# Altium PCB PCB1.PcbDoc
Units mm, origin at the board's own origin, x right, y up, seen from the top; angles counter-clockwise.
Board outline 49 x 100 mm, 2 copper layers (Top Layer, Bottom Layer); 19 components, 39 nets, 180 pads, 5 vias.
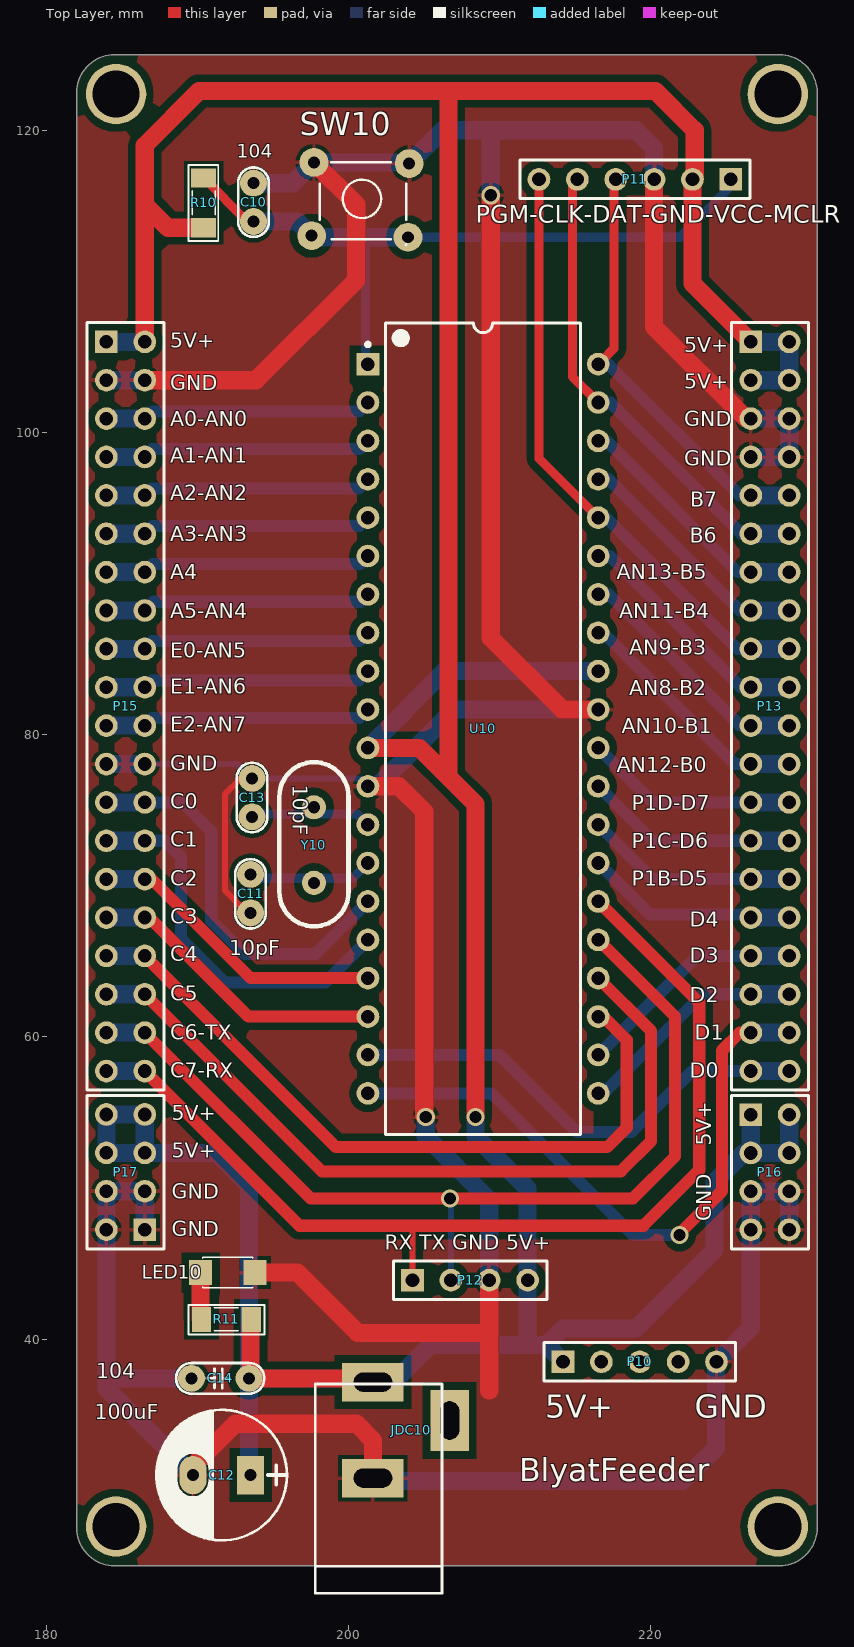
[diagram p0: Top Layer view]
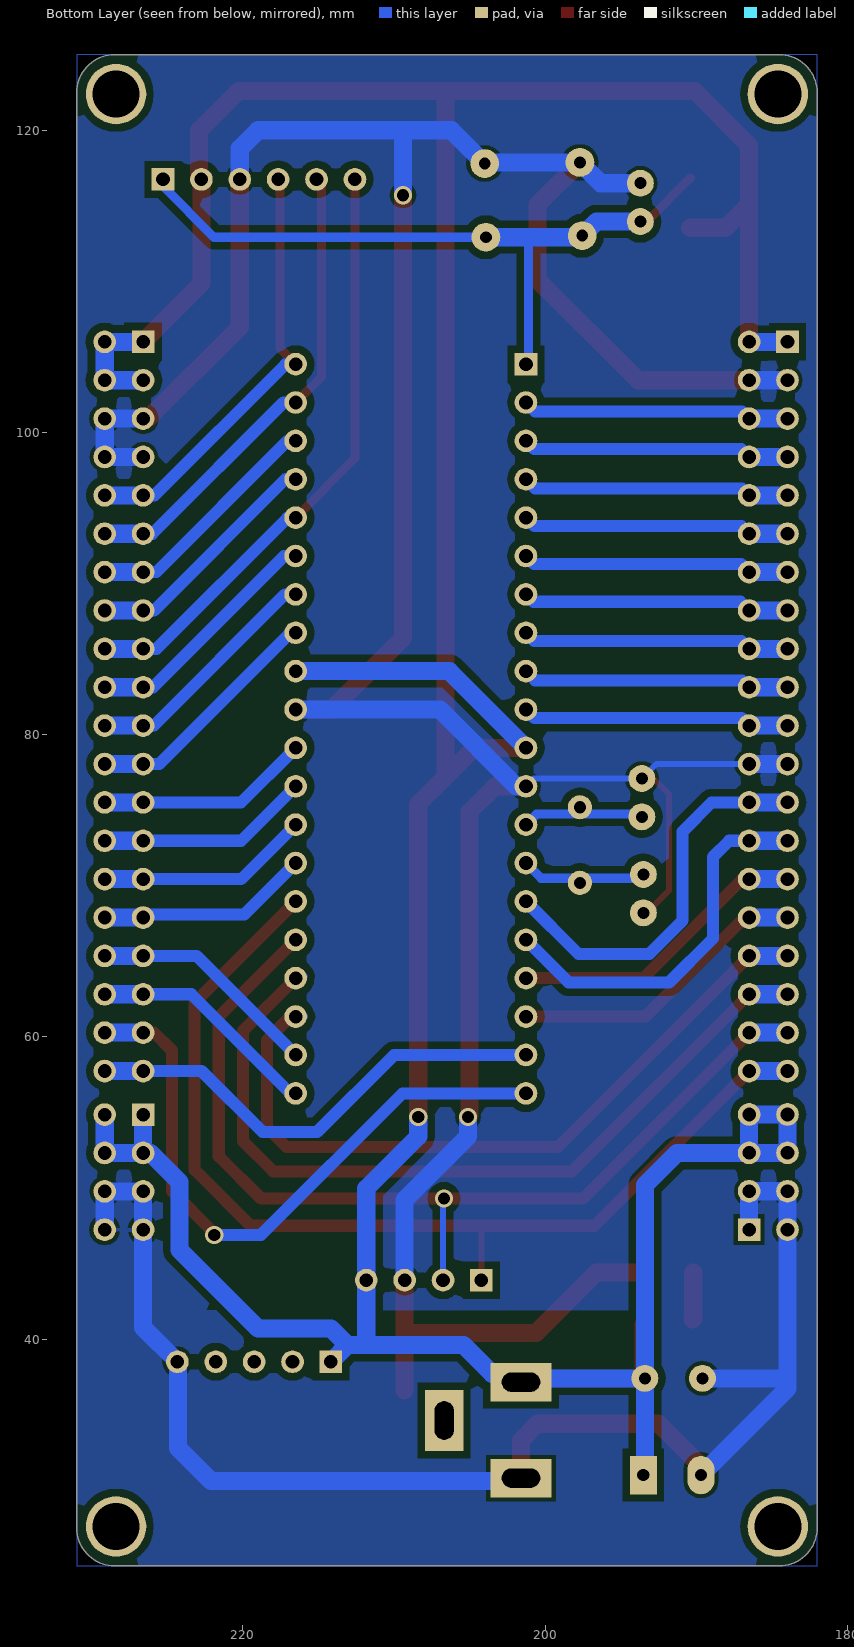
[diagram p1: Bottom Layer view, seen from below]
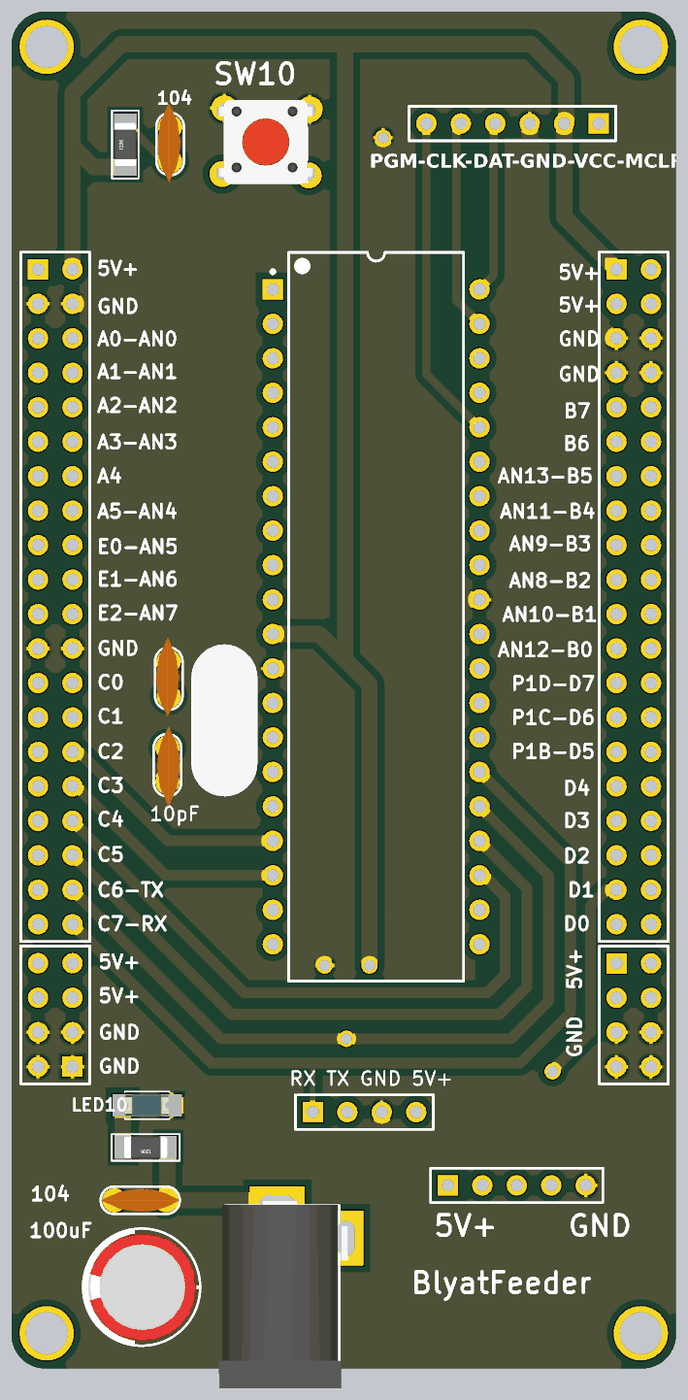
[diagram p2: 3D render of the assembled board from above, using the file's embedded part models]

## Layer stack, top to bottom
Top Solder: solder mask 0.0102, Solder Resist, Dk 3.5
Top Layer: signal copper 0.0356
Dielectric 1: dielectric 0.32, FR-4, Dk 4.8
Bottom Layer: signal copper 0.0356
Bottom Solder: solder mask 0.0102, Solder Resist, Dk 3.5

## Board outline
182,27.5 182,122.5 cw(c184.5,122.5) 184.5,125 228.5,125 cw(c228.5,122.5) 231,122.5 231,27.5 cw(c228.5,27.5) 228.5,25 184.5,25 cw(c184.5,27.5)

## Design rules (kind name [scope] priority, off if disabled: settings)
Clearance [InPolygon] p1: gap=0.5
Clearance Clearance_1 [All] p2: gap=0.4
PlaneClearance [All] p1: clearance=1
PolygonConnect [All] p1: connectstyle=Relief reliefconductorwidth=0.254 reliefentries=4 polygonreliefangle="90 Angle" airgapwidth=0.254
RoomDefinition PIC16F887 [InComponentClass('PIC16F887')] p1: confinementstyle=ConfineIn formatcopy=TRUE lockcomponents=FALSE outline 0,0 50.8,0 50.8,25.4 0,25.4
RoutingVias [All] p1: holewidth=0.8 width=1.2 viastyle="Through Hole" minholewidth=0.6 minwidth=1 maxholewidth=1.4 maxwidth=2
SolderMaskExpansion [All] p1: expansion=0.102
Width [All] p1: maxlimit=1.2 minlimit=0.4 preferedwidth=0.8
29 further rules are at their usual default settings.

## Classes and differential pairs
component class PIC16F887: C10 C11 C12 C13 C14 JDC10 LED10 P10 P11 P12 P13 P15 P17 R10 R11 SW10 U10 Y10

## Components (designator, comment, footprint, x,y, rotation, side; value= is the part's Value field where it differs from the comment)
C10 "100pF" CN1 193.7,113.96 r90 top
C11 "22pF" CN1 193.5,70.75 r270 top
C12 "100uF/35V" CP1.5/3.4 193.5,31 r180 top
C13 "22pF" CN1 193.6,74.56 r90 top
C14 "104" CN1.5 189.59,37.4 r0 top
JDC10 "Jac DC" DC-IN 204.14,33.975 r90 top
LED10 "LED" LED-1206-Blue 190.2,44.4 r0 top
P10 "Header 5" HDR1X5 214.18,38.5 r0 top
P11 "Header 6" HDR1X6 225.29,116.75 r180 top
P12 "Header 4" HDR1X4 204.22,43.9 r0 top
P13 "Header 20X2" HDR2X20 226.61,106 r270 top
P15 "Header 20X2" HDR2X20 183.961,106 r270 top
P16 "Header 4X2" HDR2X4 226.61,54.859 r270 top
P17 "Header 4X2" HDR2X4 186.501,47.247 r90 top
R10 "10K" RES-SMD-1206 190.4,115.2 r90 top
R11 "1K" RES-SMD-1206 191.9,41.3 r180 top
SW10 "SW" SW4 197.701,117.876 r0 top
U10 "PIC16F887-I/P" PDIP600-P40 208.891,80.396 r0 top
Y10 "20MHz" XTAL 197.7,72.75 r90 top

## Footprints (in the part's own frame and the unit in brackets; to place one, negate y for a bottom-side part, rotate by r counter-clockwise, add the part's x,y. Pads: shape width x height; smd on the part's side, far side on the other; paste and mask are expansions set on the pad)
CN1 [mil]
  round 70 hole 31: 1(0,0) 2(100,0)
  silkscreen extent -40,-40 141,40, body extent -60,-30 170,37, height 265
CN1.5 [mil]
  round 70 hole 31: 1(0,0) 2(150,0)
  silkscreen extent -40,-40 190,40, body extent -40,-33 190,33, height 235
CP1.5/3.4 [mil] "Tu hoa 220->470uF,16V, 470uF/16V,25V"
  rect 70x100 hole 32: 1(0,0)
  oval 70x100 hole 32: 2(150,0)
  silkscreen extent -95,-170 245,170, body extent -85,-157 230,157, height 446
DC-IN [mil] "Jac DC input"
  rect 100x160 hole 50 slot 100 at 90 deg: 1(125,100) 2(-125,100)
  rect 160x100 hole 50 slot 100 at 0 deg: 3(25,-100)
  silkscreen extent -425,-80 120,250, body extent -410,-105 134,269, height 434
HDR1X4 [mm] "Connector; Header; 4 Position"
  rect 1.5x1.5 hole 0.9: 1(0,0)
  round 1.5 hole 0.9: 2(2.54,0) 3(5.08,0) 4(7.62,0)
  silkscreen extent -1.27,-1.27 8.89,1.27
HDR1X5 [mm] "Connector; Header; 5 Position"
  rect 1.5x1.5 hole 0.9: 1(0,0)
  round 1.5 hole 0.9: 2(2.54,0) 3(5.08,0) 4(7.62,0) 5(10.16,0)
  silkscreen extent -1.27,-1.27 11.43,1.27
HDR1X6 [mm] "Connector; Header; 6 Position"
  rect 1.5x1.5 hole 0.9: 1(0,0)
  round 1.5 hole 0.9: 2(2.54,0) 3(5.08,0) 4(7.62,0) 5(10.16,0) 6(12.7,0)
  silkscreen extent -1.27,-1.27 13.97,1.27
HDR2X4 [mm] "Connector; Header; 4x2 Position"
  rect 1.5x1.5 hole 0.9: 1(0,0)
  round 1.5 hole 0.9: 2(0,2.54) 3(2.54,0) 4(2.54,2.54) 5(5.08,0) 6(5.08,2.54) 7(7.62,0) 8(7.62,2.54)
  silkscreen extent -1.27,-1.27 8.89,3.81
HDR2X20 [mm] "Connector; Header; 20x2 Position"
  rect 1.5x1.5 hole 0.9: 1(0,0)
  round 1.5 hole 0.9: 2(0,2.54) 3(2.54,0) 4(2.54,2.54) 5(5.08,0) 6(5.08,2.54) 7(7.62,0) 8(7.62,2.54) 9(10.16,0) 10(10.16,2.54) 11(12.7,0) 12(12.7,2.54) 13(15.24,0) 14(15.24,2.54) 15(17.78,0) 16(17.78,2.54) 17(20.32,0) 18(20.32,2.54) 19(22.86,0) 20(22.86,2.54) 21(25.4,0) 22(25.4,2.54) 23(27.94,0) 24(27.94,2.54) 25(30.48,0) 26(30.48,2.54) 27(33.02,0) 28(33.02,2.54) 29(35.56,0) 30(35.56,2.54) 31(38.1,0) 32(38.1,2.54) 33(40.64,0) 34(40.64,2.54) 35(43.18,0) 36(43.18,2.54) 37(45.72,0) 38(45.72,2.54) 39(48.26,0) 40(48.26,2.54)
  silkscreen extent -1.27,-1.27 49.53,3.81
LED-1206-Blue [mil] "Compoment SMD 120x60mil"
  rect 60x65 smd: 1(0,0) 2(142,0)
  silkscreen extent 6,-40 136,40, body extent 7,-31 133,31, height 43
PDIP600-P40 [mm] "DIP, 40-Leads, Row Spacing 15.24mm, Pitch 2.54mm, Body 51.8x13.5mm"
  rect 1.5x1.5 hole 0.9: 1(-7.62,24.13)
  round 1.5 hole 0.9: 2(-7.62,21.59) 3(-7.62,19.05) 4(-7.62,16.51) 5(-7.62,13.97) 6(-7.62,11.43) 7(-7.62,8.89) 8(-7.62,6.35) 9(-7.62,3.81) 10(-7.62,1.27) 11(-7.62,-1.27) 12(-7.62,-3.81) 13(-7.62,-6.35) 14(-7.62,-8.89) 15(-7.62,-11.43) 16(-7.62,-13.97) 17(-7.62,-16.51) 18(-7.62,-19.05) 19(-7.62,-21.59) 20(-7.62,-24.13) 21(7.62,-24.13) 22(7.62,-21.59) 23(7.62,-19.05) 24(7.62,-16.51) 25(7.62,-13.97) 26(7.62,-11.43) 27(7.62,-8.89) 28(7.62,-6.35) 29(7.62,-3.81) 30(7.62,-1.27) 31(7.62,1.27) 32(7.62,3.81) 33(7.62,6.35) 34(7.62,8.89) 35(7.62,11.43) 36(7.62,13.97) 37(7.62,16.51) 38(7.62,19.05) 39(7.62,21.59) 40(7.62,24.13)
  silkscreen extent -7.74,-26.85 6.45,26.85, body extent -7.3,-26.85 7.3,26.85, height 6.35
RES-SMD-1206 [mil]
  rect 50x65 smd: 1(-65,0) 2(65,0)
  silkscreen extent -99,-38 99,39, body extent -63,-31 63,32, height 40
SW4 [mil] "SW button 4pin, 250 x250 mil"
  round 75 hole 31: 1(0,0) 2(245,-195) 3(248,-3) 4(-6,-191)
  silkscreen extent 15,-215 240,0, body extent -36,-220 276,24, height 276
XTAL [mm]
  round 1.6 hole 0.8: 1(-2.552,0.001) 2(2.448,0.001)
  silkscreen extent -5.44,-2.29 5.44,2.29, body extent -5.55,-2.32 5.62,2.35, height 3.63

## Part data
C10 C11 C13: library part CN1, "Cap np  1pF - 472pF"
C12: library part CP3, "Cap 100uF/35V - 470uF/16V"
C14: library part CN1.5, "Cap np 682pF => 104pF"
JDC10: library part DCIN, "Jac DC input"
LED10: library part "LED SMD"
P10: "Header, 5-Pin"
P11: "Header, 6-Pin"
P12: "Header, 4-Pin"
P13 P15: "Header, 20-Pin, Dual row"
P16 P17: "Header, 4-Pin, Dual row"
R10 R11: library part Res-SMD, "Resistor"
SW10: library part SW4, "Switch button 4 pin"
U10: "Flash-Based, 8-Bit CMOS Microcontroller with nanoWatt Technology, 8K (x14-Bit words) Program Memory, 624 Bytes Data Memory, 35 I/O pins, 40-Pin PDIP, Standard VDD Range, Industrial Temperature"
Y10: library part XTAL, "Crystal Oscillator"

## Free pads (board coordinates)
  round 4 hole 3.1 paste+1: 0(228.4,122.4) 1(184.6,122.4) 2(228.4,27.6) 3(184.6,27.6)

## Via types
v1: diameter 1.2, hole 0.8, Top Layer to Bottom Layer, 5 vias

## Nets (pads, with @x,y where several pads share a name; then routed paths per layer and width w, separated by ;. In a path a pad name is that pad's centre, name@x,y a point inside that pad or via, vN(x,y) a via of type N, cw(c..) or ccw(c..) an arc to the next point about the centre after c; other vN are vias at no path point)
GND: C10.2 C11.2 C12.2 C13.2 C14.1 JDC10.2 LED10.2 P10.5 P11.3 P12.3 P13.5 P13.6 P13.7 P13.8 P15.3 P15.4 P15.23 P15.24 P16.5 P16.6 P16.7 P16.8 P17.1 P17.2 P17.3 P17.4 SW10.1 SW10.3 U10.12 U10.31 | length 331.6
  Top Layer w0.4: C11.2 193.29,68.21 191.8,69.7 191.8,76.05 192.85,77.1 C13.2
  Top Layer w1.2: P15.4 193.86,103.46 200.5,110.1 200.5,115.077 SW10.1 ; C12.2 189.69,31.59 192.5,34.4 200.5,34.4 201.6,33.3 JDC10.2 JDC10.2@202.87,30.8 ; LED10.2 196.6,44.4 200.6,40.4 209.3,40.4 ; U10.12 203.314,76.586 205,74.9 205,54.8 v1(205.1,54.7) ; 209.3,36.6 209.3,40.4 ; P12.3 209.3,40.4 ; v1(209.4,115.7) 209.4,86.4 214.134,81.666 U10.31 ; P11.3 220.21,106.99 226.28,100.92 P13.5
  Bottom Layer w0.4: P15.24 192.64,78.06 C13.2 200.757,77.1 U10.12
  Bottom Layer w1.2: 183.961,37.6 P17.2 P17.4 P17.3 P17.1 ; P15.23 P15.24 ; P15.3 P15.4 ; C14.1@189.59,37.6 189.39,37.4 183.961,37.4 183.961,36.729 C12.2 C12.2@189.69,30.51 ; C10.2 196.325,116.5 SW10.1 203.924,117.876 SW10.3 206.2,120 209.4,120 ; U10.12 201.886,76.586 206.966,81.666 U10.31 ; JDC10.2@202.33,30.6 222.1,30.6 224.3,32.8 224.3,38.46 P10.5 226.61,40.77 P16.7 P16.5 P16.6 P16.8 ; v1(205.1,54.7) 205.1,53.4 209.3,49.2 P12.3 ; v1(209.4,115.7) 209.4,120 ; P11.3 220.21,118.79 219,120 209.4,120 ; P13.7 P13.8 P13.6 P13.5
MCLR: C10.1 P11.1 R10.2 SW10.2 SW10.4 U10.1 | length 47.4
  Top Layer w0.6: R10.2 193.291,113.96 C10.1
  Bottom Layer w0.6: 200.148,112.923 200.148,113.125 ; 201.1,112.923 201.1,104.697 U10.1 U10.1@201.517,104.28 ; SW10.2 221.923,112.923 225.29,116.29 P11.1
  Bottom Layer w1.2: C10.1 196.613,113.96 SW10.4 197.65,112.923 200.148,112.923 201.1,112.923 SW10.2
NetLED10_1: LED10.1 R11.2 | length 3.1
  Top Layer w1.2: LED10.1 190.2,41.349 R11.2
RA0: P15.5 P15.6 U10.2 | length 17.8
  Bottom Layer w0.8: P15.6 186.981,101.4 200.685,101.4 U10.2
  Bottom Layer w1.2: P15.5 P15.6
RA1: P15.7 P15.8 U10.3 | length 17.8
  Bottom Layer w0.8: P15.8 187.021,98.9 200.725,98.9 U10.3
  Bottom Layer w1.2: P15.7 P15.8
RA2: P15.9 P15.10 U10.4 | length 17.8
  Bottom Layer w0.8: P15.10 186.961,96.3 200.665,96.3 U10.4
  Bottom Layer w1.2: P15.9 P15.10
RA3: P15.11 P15.12 U10.5 | length 17.8
  Bottom Layer w0.8: P15.12 187.001,93.8 200.705,93.8 U10.5
  Bottom Layer w1.2: P15.11 P15.12
RA4: P15.13 P15.14 U10.6 | length 18.1
  Bottom Layer w0.6: U10.6@201.271,91.471 U10.6
  Bottom Layer w0.8: P15.14 187.041,91.3 200.745,91.3 U10.6
  Bottom Layer w1.2: P15.13 P15.14
RA5: P15.15 P15.16 U10.7 | length 18.1
  Bottom Layer w0.6: U10.7@201.271,88.971 U10.7
  Bottom Layer w0.8: P15.16 187.081,88.8 200.785,88.8 U10.7
  Bottom Layer w1.2: P15.15 P15.16
RA6: C11.1 U10.14 Y10.1 | length 9.1
  Top Layer w0.4: Y10.1 Y10.1@197.699,70.599
  Bottom Layer w0.6: C11.1@193.5,71.04 194.04,70.5 197.397,70.5 Y10.1 198.001,70.5 200.265,70.5 U10.14
RA7: C13.1 U10.13 Y10.2 | length 8.4
  Bottom Layer w0.6: C13.1 193.79,74.75 197.251,74.75 Y10.2 198.147,74.75 200.567,74.75 U10.13
RB0: P13.23 P13.24 U10.33 | length 16.2
  Bottom Layer w0.8: U10.33 216.854,86.746 225.54,78.06 P13.23
  Bottom Layer w1.2: P13.23 P13.24
RB1: P13.21 P13.22 U10.34 | length 16.2
  Bottom Layer w0.8: U10.34 217.214,89.286 225.9,80.6 P13.21
  Bottom Layer w1.2: P13.21 P13.22
RB2: P13.19 P13.20 U10.35 | length 16.2
  Bottom Layer w0.8: U10.35 217.274,91.826 225.96,83.14 P13.19
  Bottom Layer w1.2: P13.19 P13.20
RB3: P11.6 P13.17 P13.18 U10.36 | length 40.2
  Top Layer w0.6: P11.6 212.59,98.287 U10.36
  Bottom Layer w0.8: U10.36 217.034,94.366 225.72,85.68 P13.17
  Bottom Layer w1.2: P13.17 P13.18
RB4: P13.15 P13.16 U10.37 | length 16.2
  Bottom Layer w0.8: U10.37 217.194,96.906 225.88,88.22 P13.15
  Bottom Layer w1.2: P13.15 P13.16
RB5: P13.13 P13.14 U10.38 | length 16.2
  Bottom Layer w0.8: U10.38 217.054,99.446 225.74,90.76 P13.13
  Bottom Layer w1.2: P13.13 P13.14
RB6: P11.5 P13.11 P13.12 U10.39 | length 31.8
  Top Layer w0.6: P11.5 214.8,116.42 214.8,103.697 U10.39
  Bottom Layer w0.8: U10.39 217.314,101.986 226,93.3 P13.11
  Bottom Layer w1.2: P13.11 P13.12
RB7: P11.4 P13.9 P13.10 U10.40 | length 28.9
  Top Layer w0.6: U10.40 216.8,104.815 217.543,105.557 217.543,116.623 P11.4
  Bottom Layer w0.8: U10.40 217.174,104.526 225.86,95.84 P13.9
  Bottom Layer w1.2: P13.9 P13.10
RC0: P15.25 P15.26 U10.15 | length 26.4
  Bottom Layer w0.8: P15.26 188.98,75.52 190.9,73.6 190.9,67.7 193.1,65.5 197.805,65.5 U10.15
  Bottom Layer w1.2: P15.25 P15.26
RC1: P15.27 P15.28 U10.16 | length 25.9
  Bottom Layer w0.4: U10.16@200.926,66.426 U10.16
  Bottom Layer w0.8: P15.28 187.82,72.98 188.9,71.9 188.9,66.5 191.8,63.6 198.445,63.6 U10.16
  Bottom Layer w1.2: P15.27 P15.28
RC2: P15.29 P15.30 U10.17 | length 20
  Top Layer w0.8: P15.30 186.96,70.44 193.514,63.886 U10.17
  Bottom Layer w1.2: P15.29 P15.30
RC3: P15.31 P15.32 U10.18 | length 20.4
  Top Layer w0.8: P15.32 186.8,67.9 193.354,61.346 U10.18
  Bottom Layer w0.4: P15.32@186.501,67.499 P15.32
  Bottom Layer w1.2: P15.31 P15.32
RC4: P15.33 P15.34 U10.23 | length 49.4
  Top Layer w0.6: U10.23 U10.23@216.665,61.5
  Top Layer w0.8: P15.34 199.161,52.7 217.1,52.7 218.4,54 218.4,59.8 216.854,61.346 U10.23
  Bottom Layer w0.4: U10.23@215.911,61.346 U10.23
  Bottom Layer w1.2: P15.33 P15.34
RC5: P15.35 P15.36 U10.24 | length 54.9
  Top Layer w0.6: U10.24 216.625,64 U10.24@216.625,63.975
  Top Layer w0.8: P15.36 198.221,51.1 218,51.1 220,53.1 220,60.397 U10.24
  Bottom Layer w0.6: U10.24@216.025,64 216.625,64 U10.24
  Bottom Layer w1.2: P15.35 P15.36
RC6: P12.2 P15.37 P15.38 U10.25 | length 65.3
  Top Layer w0.6: U10.25 U10.25@216.585,66.5
  Top Layer w0.8: P15.38 197.481,49.3 v1(206.7,49.3) 218.8,49.3 221.6,52.1 221.6,61.337 U10.25
  Bottom Layer w0.4: v1(206.7,49.3) 206.76,49.24 P12.2
  Bottom Layer w1.2: P15.37 P15.38
RC7: P12.1 P15.39 P15.40 U10.26 | length 69.9
  Top Layer w0.4: 204.2,47.5 204.22,47.48 P12.1
  Top Layer w0.6: U10.26 216.545,69 U10.26@216.9,69
  Top Layer w0.8: P15.40 196.741,47.5 204.2,47.5 219.5,47.5 223.2,51.2 223.2,62.277 U10.26
  Bottom Layer w0.6: P15.40 P15.40@186.751,57.74 ; U10.26 U10.26@216.545,69
  Bottom Layer w1.2: P15.39 P15.40
RD0: P13.39 P13.40 U10.19 | length 31.7
  Bottom Layer w0.8: U10.19 209.994,58.806 215.1,53.7 218.7,53.7 222.74,57.74 P13.39
  Bottom Layer w1.2: P13.39 P13.40
RD1: P13.37 P13.38 U10.20 | length 42.8
  Top Layer w0.8: v1(221.9,46.9) 221.9,47 224.7,49.8 224.7,59.1 225.88,60.28 P13.37
  Bottom Layer w0.8: U10.20 209.434,56.266 218.8,46.9 v1(221.9,46.9)
  Bottom Layer w1.2: P13.37 P13.38
RD2: P13.35 P13.36 U10.21 | length 15.4
  Bottom Layer w0.8: U10.21 216.866,56.266 223.42,62.82 P13.35
  Bottom Layer w1.2: P13.35 P13.36
RD3: P13.33 P13.34 U10.22 | length 15.4
  Bottom Layer w0.8: U10.22 223.065,65.36 P13.33
  Bottom Layer w1.2: P13.33 P13.34
RD4: P13.31 P13.32 U10.27 | length 14.1
  Bottom Layer w0.8: U10.27 219.917,68.1 226.41,68.1 P13.31
  Bottom Layer w1.2: P13.31 P13.32
RD5: P13.29 P13.30 U10.28 | length 14.1
  Bottom Layer w0.8: U10.28 220.117,70.44 P13.29
  Bottom Layer w1.2: P13.29 P13.30
RD6: P13.27 P13.28 U10.29 | length 14.1
  Bottom Layer w0.8: U10.29 220.117,72.98 P13.27
  Bottom Layer w1.2: P13.27 P13.28
RD7: P13.25 P13.26 U10.30 | length 14.1
  Bottom Layer w0.8: U10.30 220.137,75.5 225.36,75.5 225.38,75.52 P13.25
  Bottom Layer w1.2: P13.25 P13.26
RE0: P15.17 P15.18 U10.8 | length 17.8
  Bottom Layer w0.8: P15.18 187.021,86.2 200.725,86.2 U10.8
  Bottom Layer w1.2: P15.17 P15.18
RE1: P15.19 P15.20 U10.9 | length 17.8
  Bottom Layer w0.8: P15.20 186.961,83.6 200.665,83.6 U10.9
  Bottom Layer w1.2: P15.19 P15.20
RE2: P15.21 P15.22 U10.10 | length 18
  Bottom Layer w0.6: U10.10@201.271,81.371 U10.10
  Bottom Layer w0.8: P15.22 187.001,81.1 200.705,81.1 U10.10
  Bottom Layer w1.2: P15.21 P15.22
VCC: C12.1 C14.2 JDC10.1 P10.1 P11.2 P12.4 P13.1 P13.2 P13.3 P13.4 P15.1 P15.2 P16.1 P16.2 P16.3 P16.4 P17.5 P17.6 P17.7 P17.8 R10.1 R11.1 U10.11 U10.32 | length 293
  Top Layer w0.6: P13.3@226.61,103.1 P13.3
  Top Layer w1.2: P15.2 186.5,106.001 186.5,119 190.1,122.6 206.6,122.6 ; 186.501,116.501 186.501,115.099 188.051,113.549 R10.1 ; R11.1@193.5,40.951 193.5,37.4 JDC10.1@201.6,37.4 ; U10.11 204.674,79.126 206.6,77.2 ; v1(208.4,54.7) 208.4,75.4 206.6,77.2 ; P13.1 222.75,109.86 P11.2 222.9,116.9 222.9,120 220.3,122.6 206.6,122.6 ; 206.6,77.2 206.6,122.6
  Bottom Layer w1.2: P15.1 P15.2 ; C12.1 193.4,31.1 C14.2 ; U10.11 206.351,84.206 U10.32 ; v1(208.4,54.7) 208.4,53.4 211.84,49.96 P12.4 211.84,39.6 ; P10.1 213.08,39.6 ; P16.1 P16.3 ; P13.3 P13.4 P13.2 P13.1 ; P16.2 P16.4 P16.3 ; P17.5 P17.7 P17.8 P17.6 P17.5 ; P17.5 191.273,52.327 193.4,50.2 C14.2 ; C14.2 201.35,37.4 JDC10.1 202.15,37.7 203.5,37.7 205.4,39.6 211.84,39.6 ; 211.84,39.6 213.08,39.6 ; 213.08,39.6 214.18,40.7 219,40.7 224.2,45.9 224.2,50.4 226.119,52.319 P16.3
pads on no net: JDC10.3 P10.2 P10.3 P10.4

## Polygon pours and split planes (outlines as drawn)
GND on Bottom Layer "BOT" (solid, remove dead copper, pour order 63): 182,109.041 230.959,109.041 231,109 231,41.9 182.1,41.9 182,41.8
GND on Bottom Layer "BOT" (solid, remove dead copper, pour order 61): 231,25 182,25 182,41.8 182.1,41.9 231,41.9
GND on Bottom Layer "BOT" (solid, remove dead copper, pour order 59): 182,125 231,125 231,109 182.1,109 182,108.9
GND on Bottom Layer "Bottom Layer-GND" (solid, remove dead copper, shelved, pour order 54): 182,125 231,125 231,25 182,25
GND on Bottom Layer "BOT" (solid, remove dead copper, shelved, pour order 52): 182,125 231,125 231,25 182,25
GND on Top Layer "BOT" (solid, remove dead copper, pour order 57): 182,125 231,125 231,25 182,25

## Other copper
Top Layer:
  pour cut-out: 189.074,114.658 189.074,115.716 190.884,115.716 191.1,115.5 191.1,114.7 190.8,114.4
  pour cut-out: 218.358,115.702 218.361,115.7 219.6,115.7 219.6,115.98 218.98,116.6 218.9,116.6 218.9,116.4 218.5,116
  pour cut-out: 220.8,115.7 221.641,115.7 221.641,116.159 221.6,116.2 221.426,116.026 220.892,116.026 220.809,115.943
  pour cut-out: 216.185,55.048 216.185,53.585 216.1,53.5 217,53.5 217.7,54.2 217.7,55.2 217.5,55.4 216.537,55.4

## Silkscreen, mask and mechanical layers (free items; w line width, h text height)
Top Overlay:
  text "104" at 192.6,118.2 h0.9
  text "PGM-CLK-DAT-GND-VCC-MCLR" at 208.4,113.5 h2
  text "5V+" at 188.2,105.6 h1
  text "5V+" at 222.2,105.3 h1
  text "5V+" at 222.2,102.9 h1
  text "GND" at 188.2,102.8 h1
  text "A0-AN0" at 188.2,100.4 h1
  text "GND" at 222.2,100.4 h1
  text "A1-AN1" at 188.2,98 h1
  text "GND" at 222.2,97.8 h1
  text "A2-AN2" at 188.2,95.5 h1
  text "B7" at 222.6,95.1 h1
  text "A3-AN3" at 188.2,92.8 h1
  text "B6" at 222.565,92.7 h1
  text "A4" at 188.2,90.3 h1
  text "AN13-B5" at 217.733,90.3 h1
  text "A5-AN4" at 188.2,87.7 h1
  text "AN11-B4" at 217.9,87.7 h1
  text "AN9-B3" at 218.566,85.3 h1
  text "E0-AN5" at 188.2,85.1 h1
  text "E1-AN6" at 188.2,82.7 h1
  text "AN8-B2" at 218.566,82.6 h1
  text "E2-AN7" at 188.2,80.2 h1
  text "AN10-B1" at 218.067,80.1 h1
  text "GND" at 188.2,77.6 h1
  text "AN12-B0" at 217.733,77.5 h1
  text "10pF" at 196.3,76.7 h1 r270
  text "C0" at 188.2,75.1 h1
  text "P1D-D7" at 218.733,75 h1
  text "C1" at 188.2,72.6 h1
  text "P1C-D6" at 218.733,72.5 h1
  text "C2" at 188.2,70 h1
  text "P1B-D5" at 218.733,70 h1
  text "C3" at 188.2,67.5 h1
  text "D4" at 222.565,67.3 h1
  text "10pF" at 192.1,65.4 h1
  text "C4" at 188.2,65 h1
  text "D3" at 222.565,64.9 h1
  text "C5" at 188.2,62.4 h1
  text "D2" at 222.565,62.3 h1
  text "C6-TX" at 188.2,59.8 h1
  text "D1" at 222.898,59.8 h1
  text "C7-RX" at 188.2,57.3 h1
  text "D0" at 222.565,57.3 h1
  text "5V+" at 188.3,54.5 h1
  text "5V+" at 224,52.8 h1 r90
  text "5V+" at 188.3,52 h1
  text "GND" at 188.3,49.3 h1
  text "GND" at 224,47.8 h1 r90
  text "GND" at 188.3,46.8 h1
  text "RX TX GND 5V+" at 202.4,45.9 h1
  text "104" at 183.3,37.4 h1
  text "5V+" at 213,34.8 h1.52
  text "GND" at 222.9,34.8 h1.52
  text "100uF" at 183.2,34.7 h1
  text "BlyatFeeder" at 211.3,30.6 h1.52